# Altium PCB plusz-end-card-with-turnstile-mezzanine.PcbDoc
Units mm, origin at the board's own origin, x right, y up, seen from the top; angles counter-clockwise.
Board outline 80 x 71.5 mm, 4 copper layers (Top, Route2, Route15, Bottom), stack 1.791 mm thick; 29 components, 21 nets, 107 pads, 536 vias.
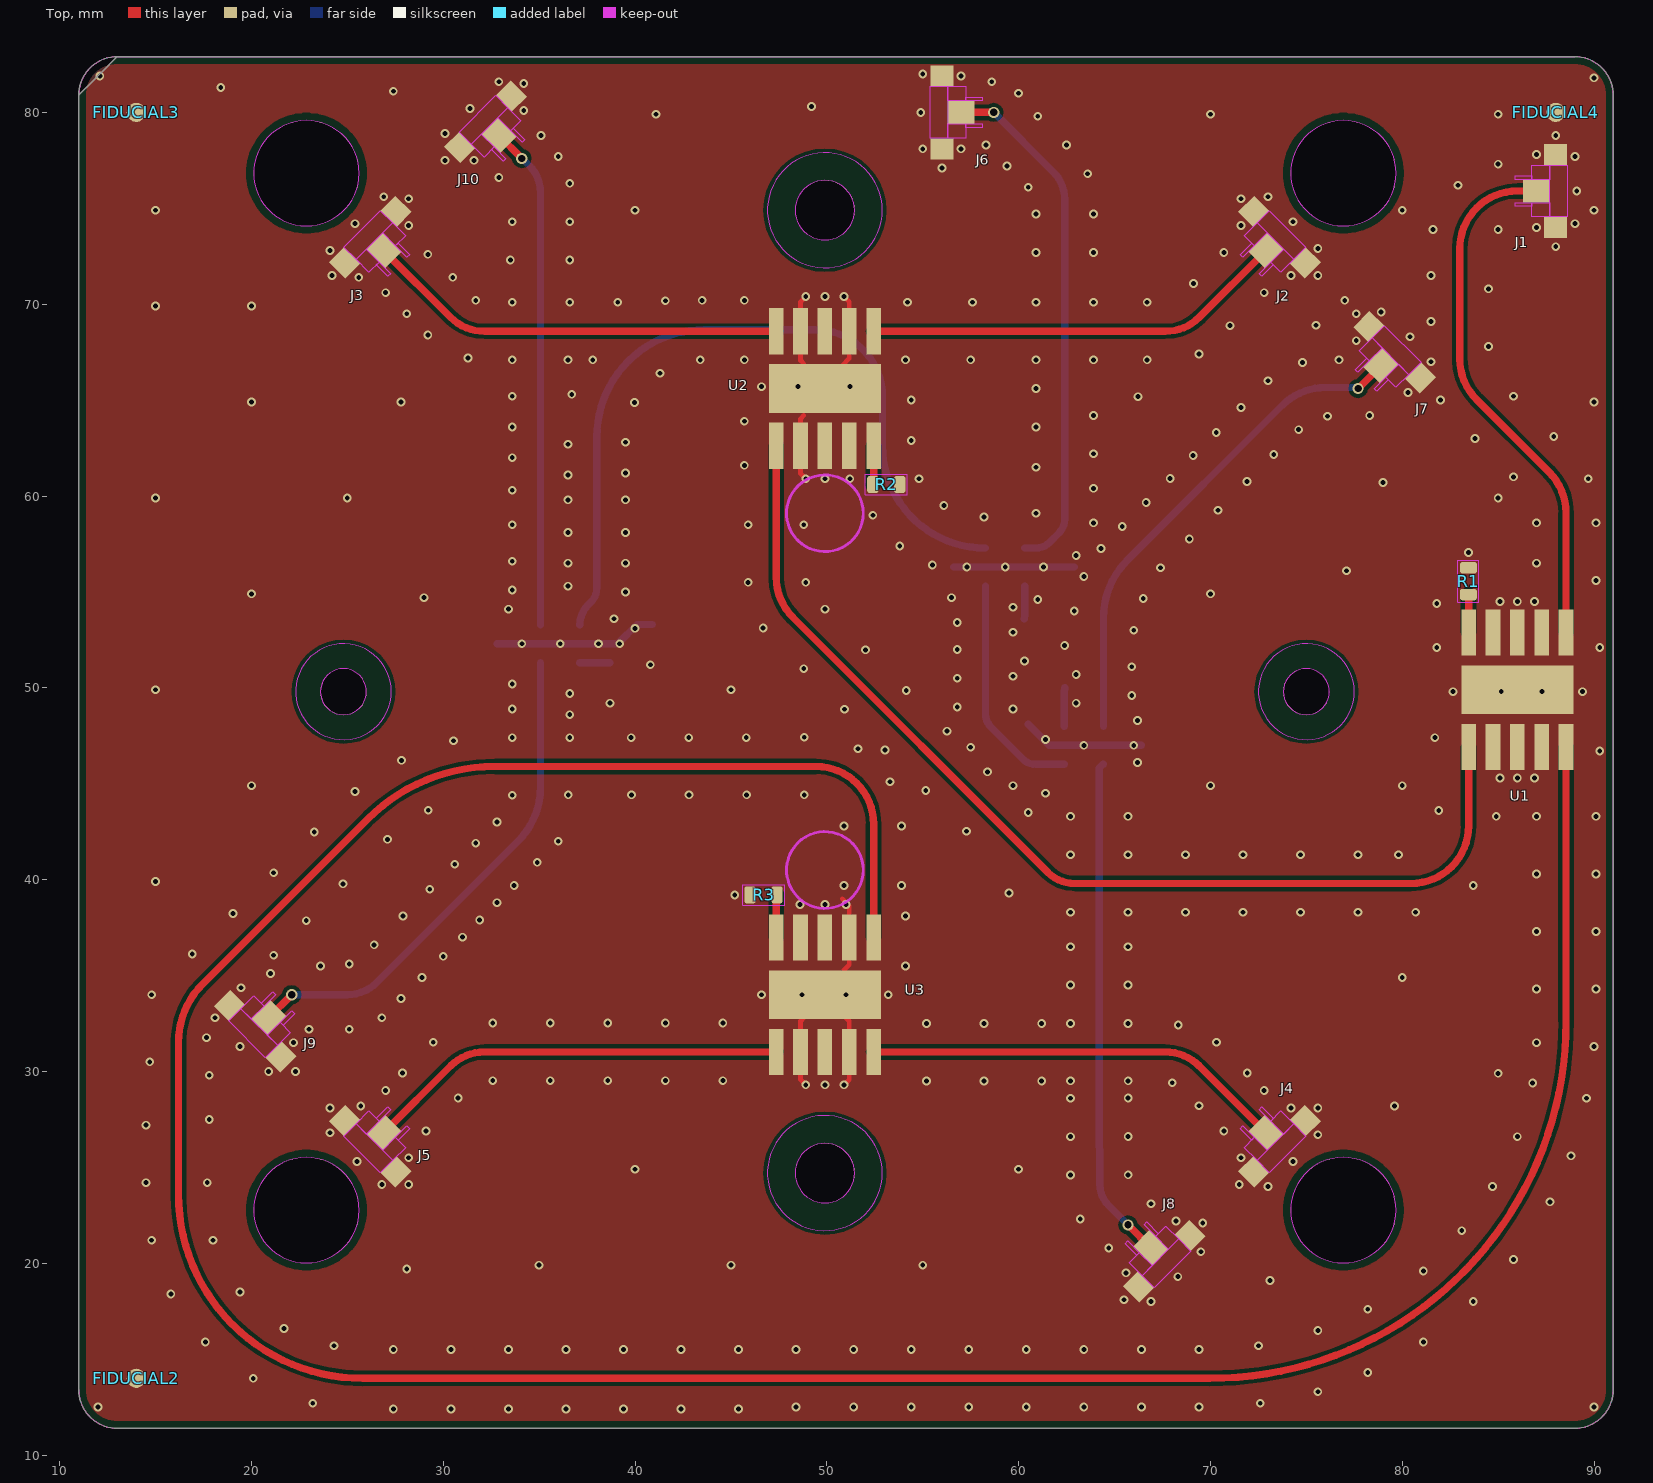
[diagram p0: Top view]
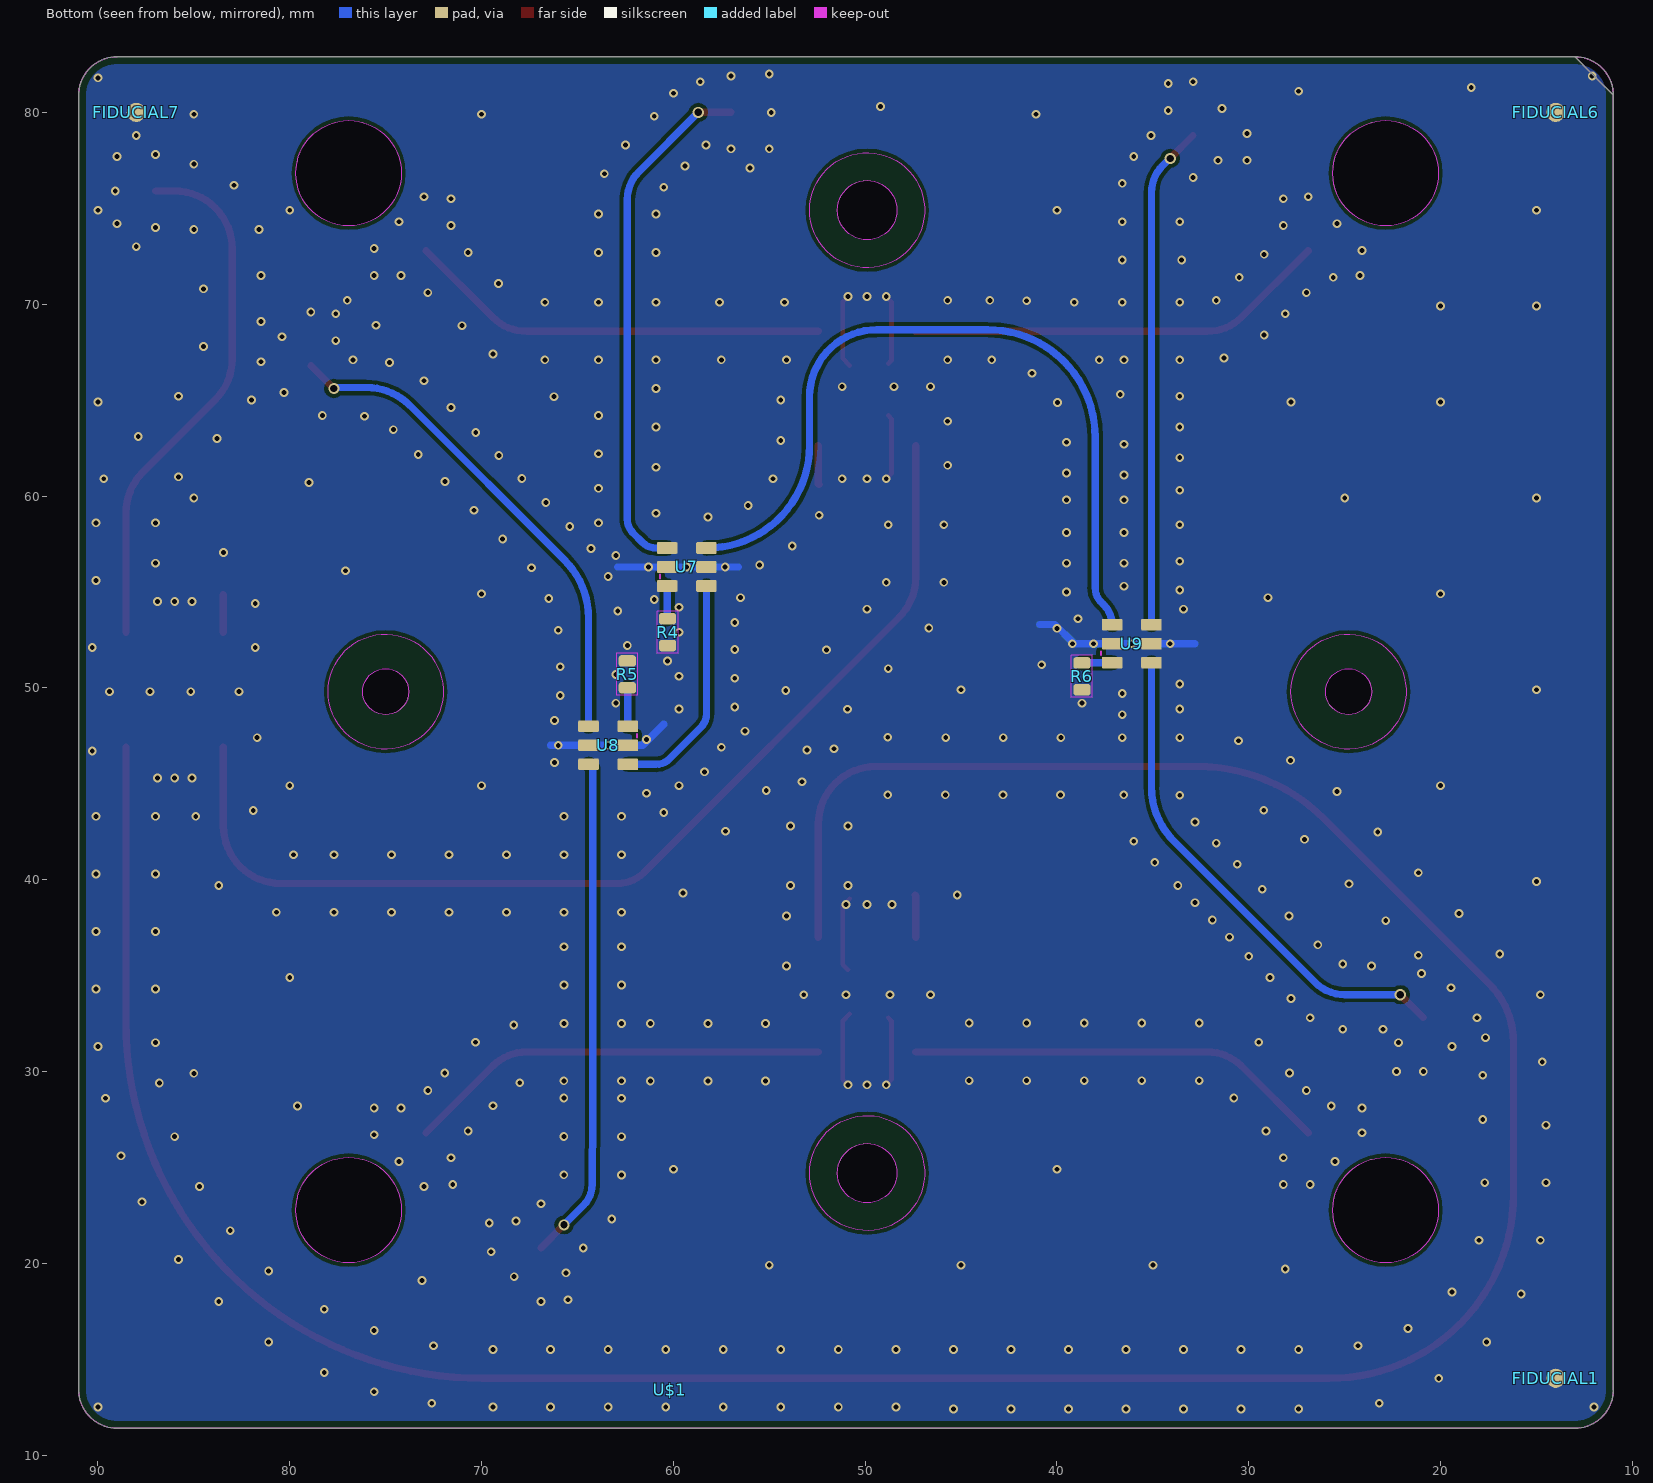
[diagram p1: Bottom view, seen from below]
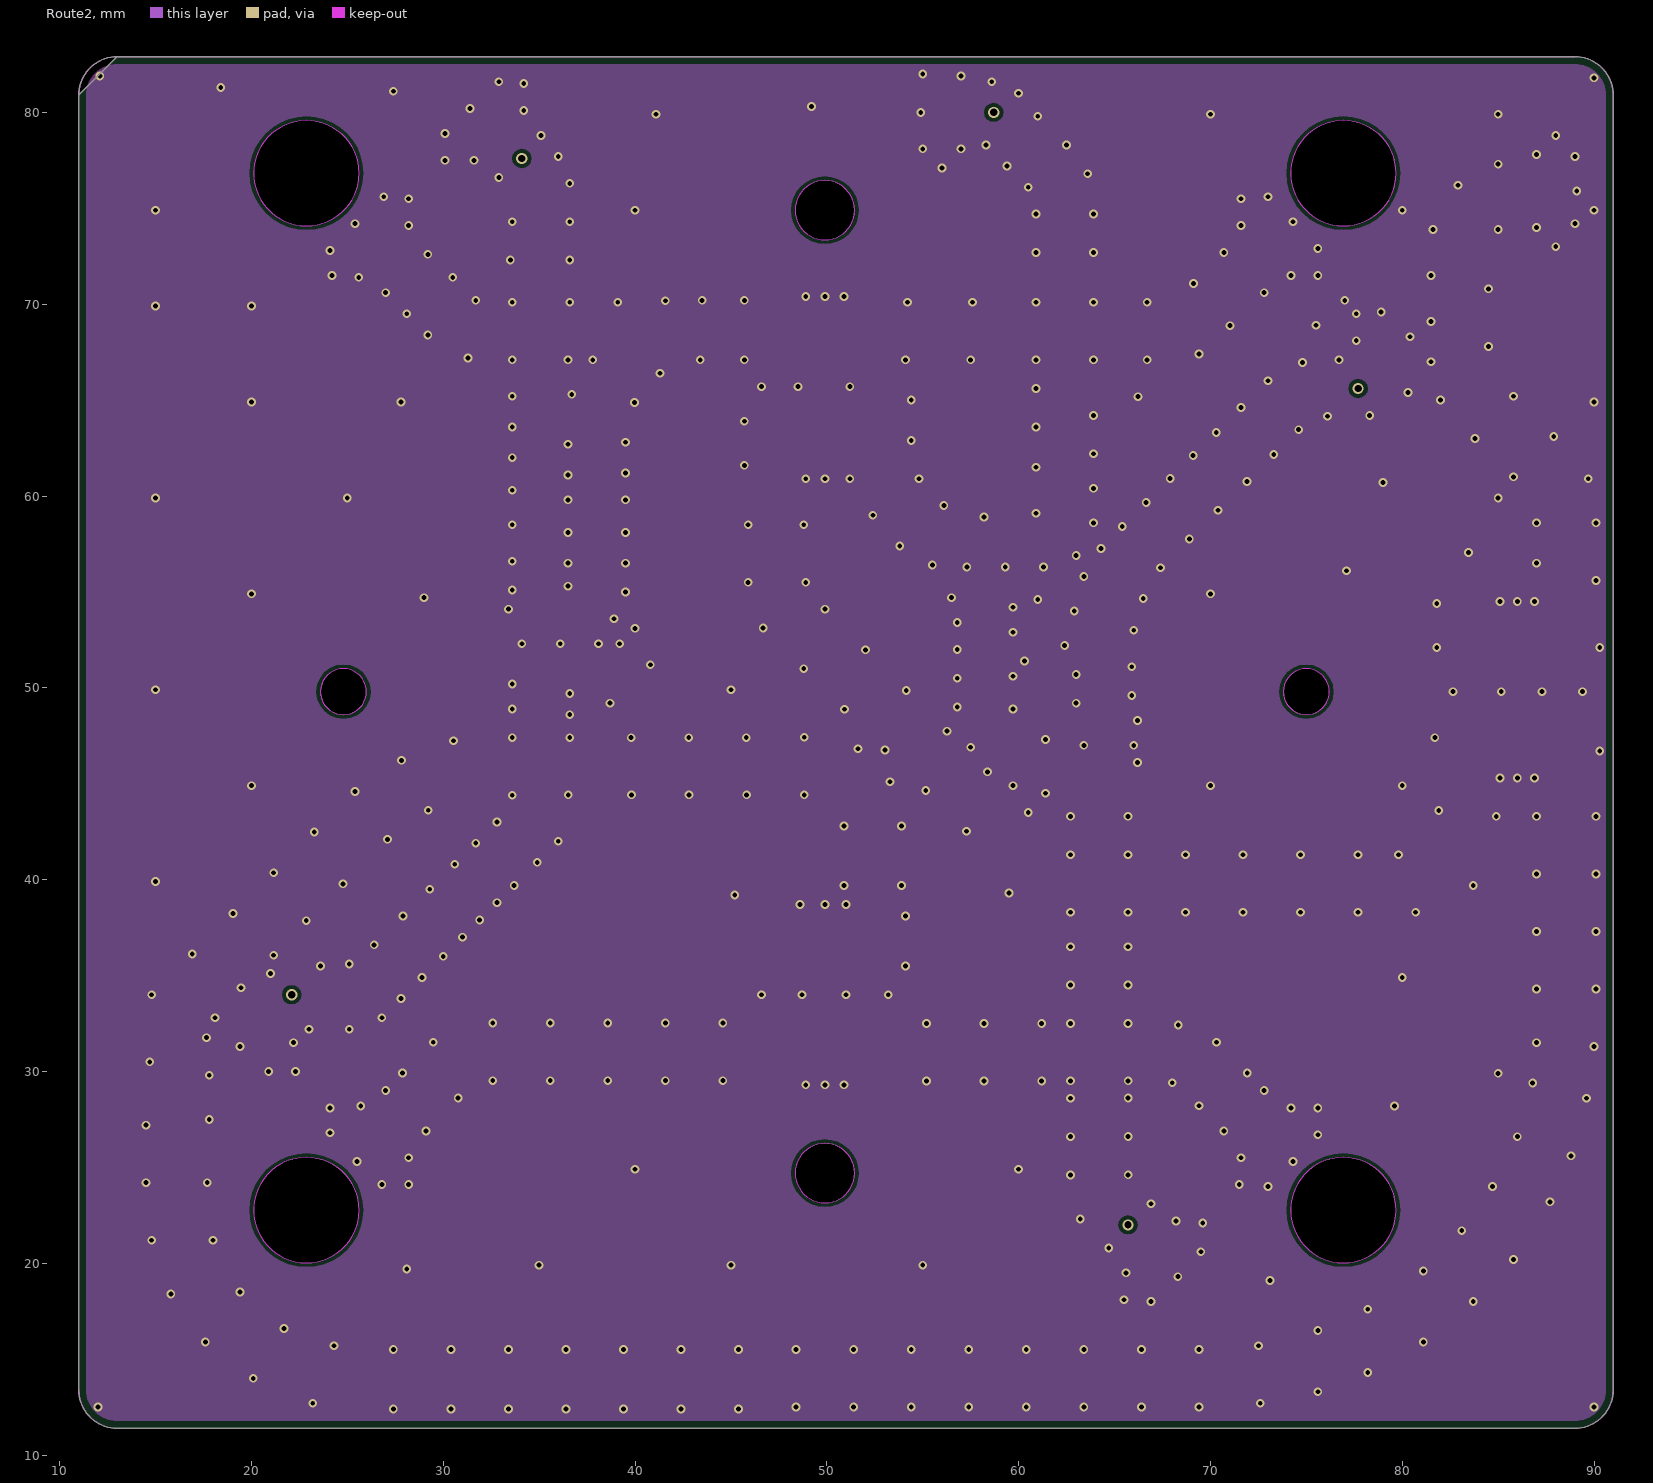
[diagram p2: Route2]
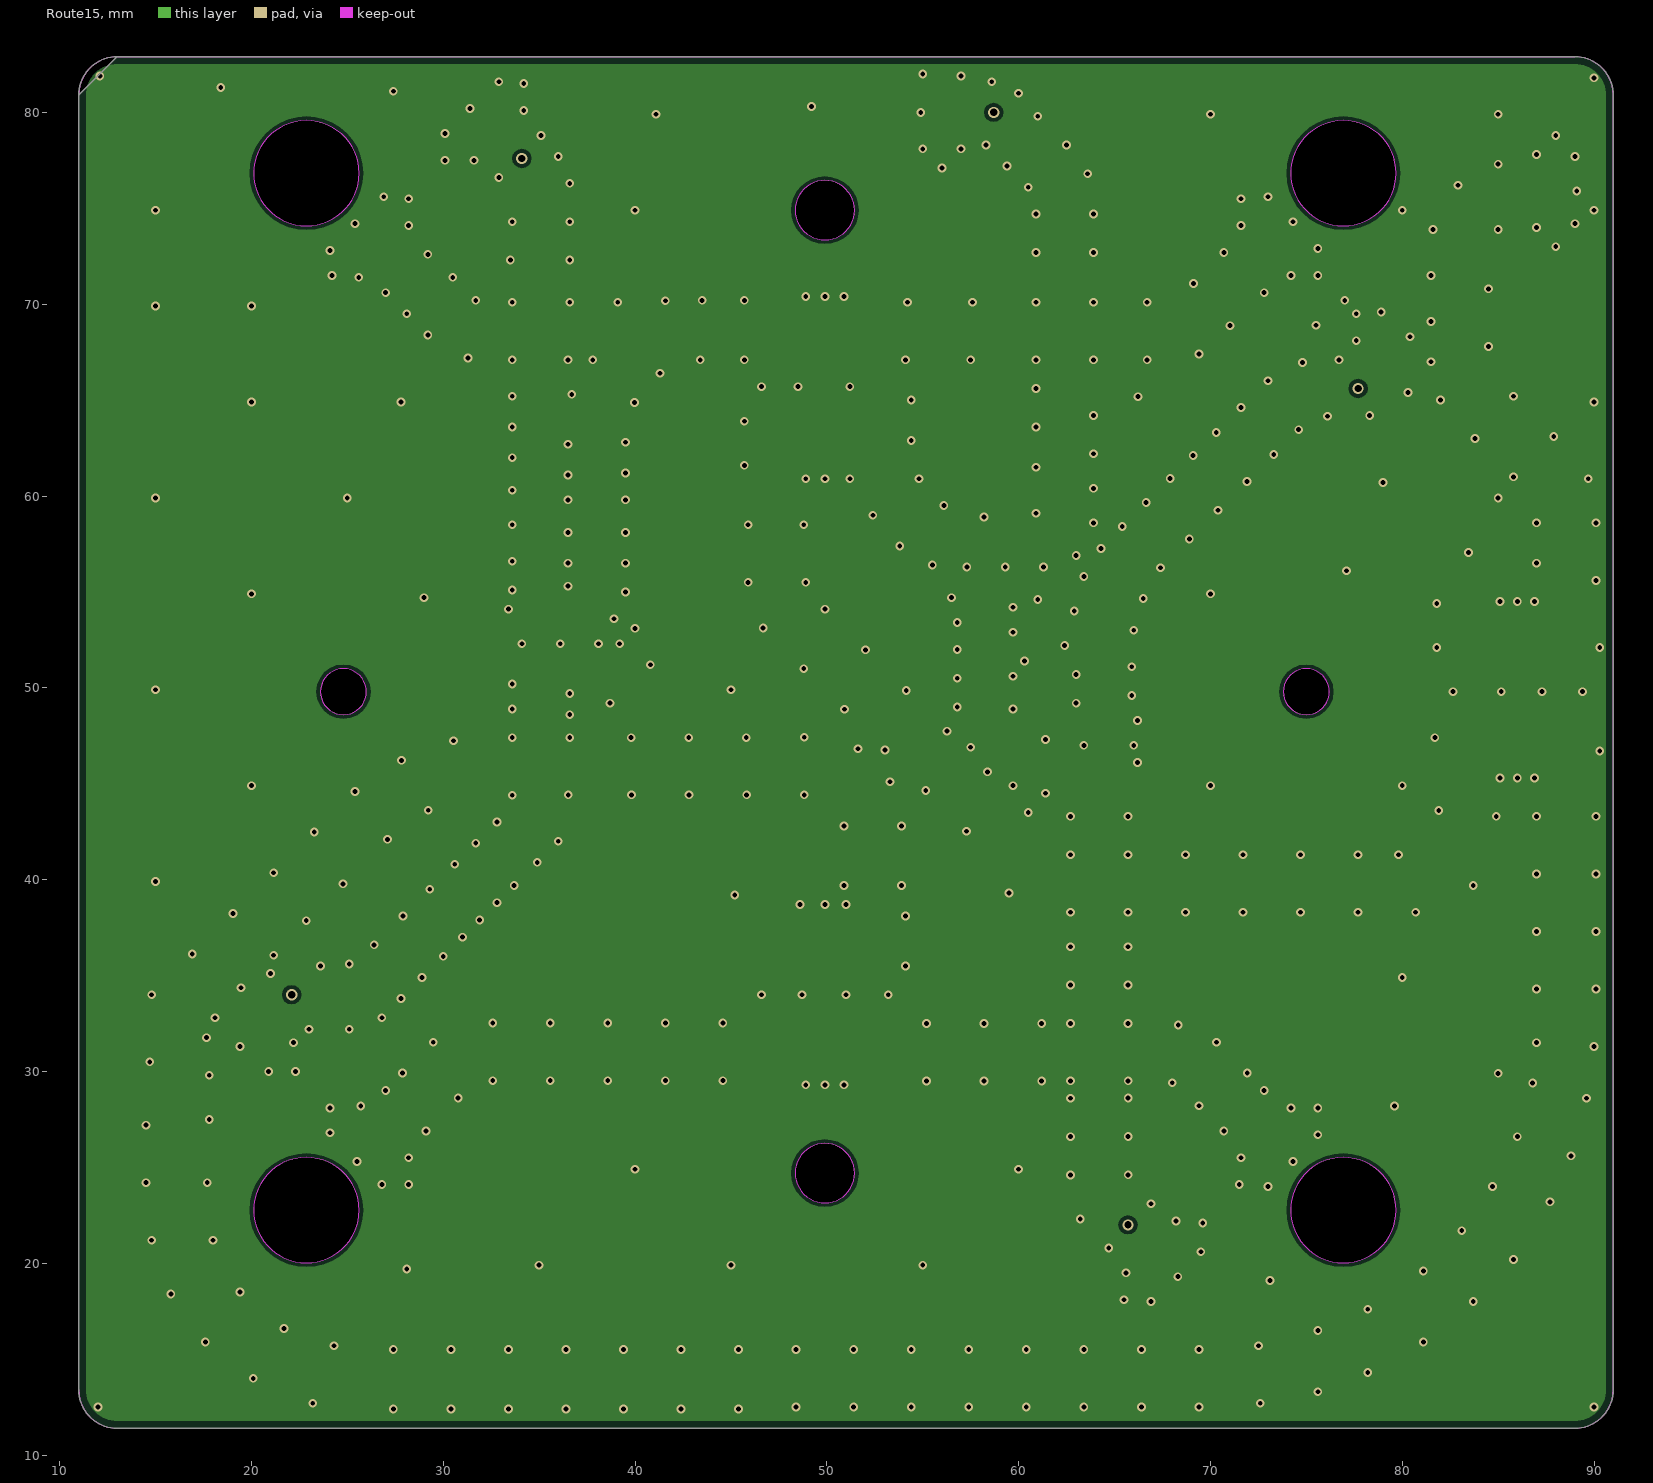
[diagram p3: Route15]

## Layer stack, top to bottom
Top Solder: solder mask 0.0102, Solder Resist, Dk 3.5
Top: signal copper 0.0356
Dielectric 1: dielectric 0.32, FR-4, Dk 4.8
Route2: signal copper 0.0178
Dielectric 2: core 0.1702, FR-4, Dk 4.8
Route15: signal copper 0.0178
Dielectric 3: core 1.1938, FR-4, Dk 4.8
Bottom: signal copper 0.0356
Bottom Solder: solder mask 0.0102, Solder Resist, Dk 3.5

## Board outline
11,80.9 cw(c13,80.9) 13,82.9 89,82.9 cw(c89,80.9) 91,80.9 91,13.4 cw(c89,13.4) 89,11.4 13,11.4 cw(c13,13.4) 11,13.4 11,80.9 cw(c13,80.9)
cut-out: 22.87,74.08 ccw(c22.87,76.83) 25.62,76.83 ccw(c22.87,76.83) 22.87,79.58 ccw(c22.87,76.83) 20.12,76.83 ccw(c22.87,76.83)
cut-out: 76.93,74.08 ccw(c76.93,76.83) 79.68,76.83 ccw(c76.93,76.83) 76.93,79.58 ccw(c76.93,76.83) 74.18,76.83 ccw(c76.93,76.83)
cut-out: 22.87,20.02 ccw(c22.87,22.77) 25.62,22.77 ccw(c22.87,22.77) 22.87,25.52 ccw(c22.87,22.77) 20.12,22.77 ccw(c22.87,22.77)
cut-out: 76.93,20.02 ccw(c76.93,22.77) 79.68,22.77 ccw(c76.93,22.77) 76.93,25.52 ccw(c76.93,22.77) 74.18,22.77 ccw(c76.93,22.77)
cut-out: 49.9,73.35 ccw(c49.9,74.9) 51.45,74.9 ccw(c49.9,74.9) 49.9,76.45 ccw(c49.9,74.9) 48.35,74.9 ccw(c49.9,74.9)
cut-out: 49.9,23.15 ccw(c49.9,24.7) 51.45,24.7 ccw(c49.9,24.7) 49.9,26.25 ccw(c49.9,24.7) 48.35,24.7 ccw(c49.9,24.7)
cut-out: 24.8,48.6 ccw(c24.8,49.8) 26,49.8 ccw(c24.8,49.8) 24.8,51 ccw(c24.8,49.8) 23.6,49.8 ccw(c24.8,49.8)
cut-out: 75,48.6 ccw(c75,49.8) 76.2,49.8 ccw(c75,49.8) 75,51 ccw(c75,49.8) 73.8,49.8 ccw(c75,49.8)

## Design rules (kind name [scope] priority, off if disabled: settings)
BoardOutlineClearance mdCopperDimension [All] p1: gap=0.254 ignorepadtopadclearanceinfootprint=FALSE except(0: Arc-SplitContinuation Track-SplitContinuation SMDPad-SplitContinuation THPad-SplitContinuation Via-SplitContinuation Fill-SplitContinuation Poly-SplitContinuation Region-SplitContinuation Text-SplitContinuation; 0.381: Poly-OutlineEdge Poly-CavityEdge Poly-CutoutEdge Poly-SplitBarrior)
Clearance Clearance_for_PolygonClass_Isolate_7.87 [InPolygonClass('Isolate_7.87') vs IsArc Or IsTrack Or IsPad Or IsVia Or IsFill Or IsRegion Or IsText] p1: gap=0.2 ignorepadtopadclearanceinfootprint=FALSE
Clearance "Clearance (Same Net)" [All] p2: gap=0.127 ignorepadtopadclearanceinfootprint=FALSE
Clearance Clearance_for_NetClass_RF [InNetClass('RF') vs InNetClass('RF')] p3: gap=1 ignorepadtopadclearanceinfootprint=FALSE
Clearance [All] p4: gap=0.127 ignorepadtopadclearanceinfootprint=FALSE
HoleSize HoleSize_For_NetClass_RF [InNetClass('RF')] p1: absolutevalues=TRUE maxlimit=0.38 minlimit=0.38 maxpercent=80.000 minpercent=20.000
HoleSize [All] p2: absolutevalues=TRUE maxlimit=2540 minlimit=0.254 maxpercent=80.000 minpercent=20.000
HoleToHoleClearance mdDrill [All] p1: gap=0.152 allowstackedmicrovias=TRUE
MinimumSolderMaskSliver [All] p1 off: minsoldermaskwidth=0.254
PasteMaskExpansion Expansion_SMDPaste_OFF [InPadClass('SMDPaste_OFF')] p1: expansion=0
PasteMaskExpansion mlMinCreamFrame [All] p2: expansion=0
PolygonConnect PolygonConnect_For_PolygonThermal_ON_Width50000_Gap100000 [InPolygonClass('PolygonThermal_ON_Width50000_Gap100000') vs Not IsVia] p1: connectstyle=Relief reliefconductorwidth=0.127 reliefentries=4 polygonreliefangle="90 Angle" airgapwidth=0.254
PolygonConnect PolygonConnect_For_PolygonThermal_OFF [InPolygonClass('PolygonThermal_OFF')] p2: connectstyle=Direct reliefconductorwidth=0.254 reliefentries=4 polygonreliefangle="90 Angle" airgapwidth=0.254
PolygonConnect ThermalVias [IsVia] p3: connectstyle=Direct reliefconductorwidth=0.254 reliefentries=4 polygonreliefangle="90 Angle" airgapwidth=0.254
PolygonConnect [All] p4: connectstyle=Relief reliefconductorwidth=0.254 reliefentries=4 polygonreliefangle="90 Angle" airgapwidth=0.254
RoutingVias [All] p1: holewidth=0.254 width=0.457 viastyle="Through Hole" minholewidth=0.254 minwidth=0.457 maxholewidth=2.54 maxwidth=2.54
SolderMaskExpansion Expansion_SMDSolder_OFF [InPadClass('SMDSolder_OFF')] p1: expansion=0 istentingtop=FALSE
SolderMaskExpansion mlMinStopFrame [All] p2: expansion=0.064 istentingtop=FALSE
Width Width_For_NetClass_RF [InNetClass('RF')] p1: maxlimit=0.76 minlimit=0.254 preferedwidth=0.38
Width [All] p2: maxlimit=254 minlimit=0.127 preferedwidth=0.127
26 further rules are at their usual default settings.

## Classes and differential pairs
polygon class PolygonThermal_ON_Width50000_Gap100000: Polygon_1_Net_GND Polygon_4_Net_GND
polygon class PolygonThermal_OFF: Polygon_2_Net_GND Polygon_3_Net_GND
polygon class Isolate_7.87: Polygon_1_Net_GND Polygon_2_Net_GND Polygon_3_Net_GND Polygon_4_Net_GND
pad class SMDSolder_OFF: FIDUCIAL1-FIDUCIAL FIDUCIAL2-FIDUCIAL FIDUCIAL3-FIDUCIAL FIDUCIAL4-FIDUCIAL FIDUCIAL6-FIDUCIAL FIDUCIAL7-FIDUCIAL R1-1 R1-2 R2-1 R2-2 R3-1 R3-2 R4-1 R4-2 R5-1 R5-2 R6-1 R6-2 U1-GND-NO-PAD U2-GND-NO-PAD U3-GND-NO-PAD
pad class SMDPaste_OFF: FIDUCIAL1-FIDUCIAL FIDUCIAL2-FIDUCIAL FIDUCIAL3-FIDUCIAL FIDUCIAL4-FIDUCIAL FIDUCIAL6-FIDUCIAL FIDUCIAL7-FIDUCIAL U1-GND-NO-PAD U2-GND-NO-PAD U3-GND-NO-PAD U7-1 U7-2 U7-3 U7-4 U7-5 U7-6 U8-1 U8-2 U8-3 U8-4 U8-5 U8-6 U9-1 U9-2 U9-3 U9-4 U9-5 U9-6
net class RF: L1BAND L1BAND-SHORT L1BAND-SHORT+1/4WAVE L1BAND_0 L1BAND_90 L1BAND_180 L1BAND_270 UHF UHF-SHORT UHF-SHORT+1/4WAVE UHF_0 UHF_90 UHF_180 UHF_270

## Components (designator, comment, footprint, x,y, rotation, side; value= is the part's Value field where it differs from the comment)
FIDUCIAL1 "" FIDUCIAL-1.0X2.0 14,14 r180 bottom
FIDUCIAL2 "" FIDUCIAL-1.0X2.0 14,14 r0 top
FIDUCIAL3 "" FIDUCIAL-1.0X2.0 14,80 r0 top
FIDUCIAL4 "" FIDUCIAL-1.0X2.0 88,80 r0 top
FIDUCIAL6 "" FIDUCIAL-1.0X2.0 14,80 r180 bottom
FIDUCIAL7 "" FIDUCIAL-1.0X2.0 88,80 r180 bottom
J1 "" R107064070_SOLDER 88,75.9 r270 top
J2 "" R107064070_SOLDER 73.6,73.5 r315 top
J3 "" R107064070_SOLDER 26.2,73.5 r45 top
J4 "" R107064070_SOLDER 73.6,26.1 r225 top
J5 "" R107064070_SOLDER 26.2,26.1 r135 top
J6 "" R107064070_SOLDER 56,80 r90 top
J7 "" R107064070_SOLDER 79.6,67.5 r315 top
J8 "" R107064070_SOLDER 67.6,20.1 r225 top
J9 "" R107064070_SOLDER 20.2,32.1 r135 top
J10 "" R107064070_SOLDER 32.205,79.504 r45 top
R1 "50" .0603-C-NOSILK 83.45,55.56 r270 top
R2 "50" .0603-C-NOSILK 53.1,60.6 r180 top
R3 "50" .0603-C-NOSILK 46.7,39.2 r0 top
R4 "50" .0603-C-NOSILK 60.3,52.9 r90 bottom
R5 "50" .0603-C-NOSILK 62.4,50.7 r270 bottom
R6 "50" .0603-C-NOSILK 38.7,50.6 r90 bottom
U1 "" QBA-07+ 86,49.9 r180 top
U2 "" QBA-07+ 49.9,65.6 r0 top
U3 "" QBA-07+ 49.9,34 r180 top
U7 "QCN-19+" QCN-XXX+ 59.3,56.3 r270 bottom
U8 "QCN-19+" QCN-XXX+ 63.4,47 r90 bottom
U9 "QCN-19+" QCN-XXX+ 36.1,52.3 r270 bottom
U$1 "" FLIGHTMARKER_NEW_BOARDS 60.2,13.4 r180 bottom

## Footprints (in the part's own frame and the unit in brackets; to place one, negate y for a bottom-side part, rotate by r counter-clockwise, add the part's x,y. Pads: shape width x height; smd on the part's side, far side on the other; paste and mask are expansions set on the pad)
.0603-C-NOSILK [mm] ".0603-C-NOSILK"
  rrect50% 0.6x0.9 smd mask+0: 1(-0.7,0) 2(0.7,0)
  Top keep-out lines w0.01: 1.095,-0.545 1.095,0.545 -1.095,0.545 -1.095,-0.545 1.095,-0.545
  body extent -1.1,-0.55 1.1,0.55, height 3.81
FIDUCIAL-1.0X2.0 [mm] "FIDUCIAL-1.0X2.0"
  rrect100% 1x1 smd paste+0 mask+0: FIDUCIAL(0,0)
  body extent -1.01,-1.01 1.01,1.01, height 3.81
FLIGHTMARKER_NEW_BOARDS [mm] "FLIGHTMARKER_NEW_BOARDS"
QBA-07+ [mil] "QBA-07+"
  rect 30x95 smd: 1(-100,-117.52) 2(-50,-117.52) 3(0,-117.52) 4(50,-117.52) 5(100,-117.52) 6(100,117.52) 7(50,117.52) 8(0,117.52) 9(-50,117.52) 10(-100,117.52)
  rect 229.92x100 smd paste+0 mask+0: GND-NO-PAD(0,0)
  body extent -155,-165 155,165, height 150
QCN-XXX+ [mm] "QCN-XXX+"
  rrect20% 0.61x1.07 smd paste+0: 1(-0.99,-1.025) 2(0,-1.025) 3(0.99,-1.025) 4(0.99,1.025) 5(0,1.025) 6(-0.99,1.025)
  body extent -1.3,-1.56 1.3,1.56, height 3.81
R107064070_SOLDER [mm] "R107064070_SOLDER"
  rect 1.2x1.4 smd: P$1(0,-1)
  rect 1.1x1.2 smd: P$2(-1.9,0) P$3(1.9,0)
  Top keep-out region: 0.6,-2.1 0.6,-1.25 0.8,-1.25 0.8,-2.1
  Top keep-out region: 0.6,-1.25 0.6,-0.3 1.35,-0.3 1.35,-1.25
  Top keep-out region: -0.8,-2.1 -0.8,-1.25 -0.6,-1.25 -0.6,-2.1
  Top keep-out region: -1.35,-1.25 -1.35,-0.3 -0.6,-0.3 -0.6,-1.25
  Top keep-out region: -1.35,-0.3 -1.35,0.6 1.35,0.6 1.35,-0.3
  body extent -2.45,-2.1 2.45,0.6, height 3.81

## Part data
FIDUCIAL1 FIDUCIAL2 FIDUCIAL3 FIDUCIAL4 FIDUCIAL6 FIDUCIAL7: library part FIDUCIAL-1.0X2.0, PackageName=FIDUCIAL-1.0X2.0
J1 J2 J3 J4 J5 J6 J7 J8 J9 J10: library part R107064070_SOLDER, PackageName=R107064070_SOLDER
R1 R2 R3 R4 R5 R6: library part .0603-C-NOSILK, PackageName=.0603-C-NOSILK
U1 U2 U3: library part QBA-07+, PackageName=QBA-07+
U7 U8 U9: library part QCN-XXX+, PackageName=QCN-XXX+
U$1: library part FLIGHTMARKER_NEW_BOARDS, PackageName=FLIGHTMARKER_NEW_BOARDS

## Free pads (board coordinates)
  round 2.4 hole 2.4 unplated: MH1(24.8,49.8) MH2(75,49.8)
  round 3.1 hole 3.1 unplated: MH3(49.9,74.9) MH4(49.9,24.7)
  round 5.5 hole 5.5 unplated: MH5(76.93,76.83) MH6(22.87,76.83) MH7(76.93,22.77) MH8(22.87,22.77)

## Via types
v1: diameter 0.457/0.457/0.457/0.457 (per signal layer), hole 0.254, Top to Bottom, 531 vias
v2: diameter 0.583/0.583/0.583/0.583 (per signal layer), hole 0.38, Top to Bottom, 5 vias

## Nets (pads, with @x,y where several pads share a name; then routed paths per layer and width w, separated by ;. In a path a pad name is that pad's centre, name@x,y a point inside that pad or via, vN(x,y) a via of type N, cw(c..) or ccw(c..) an arc to the next point about the centre after c; other vN are vias at no path point)
GND: J1.P$2 J1.P$3 J2.P$2 J2.P$3 J3.P$2 J3.P$3 J4.P$2 J4.P$3 J5.P$2 J5.P$3 J6.P$2 J6.P$3 J7.P$2 J7.P$3 J8.P$2 J8.P$3 J9.P$2 J9.P$3 J10.P$2 J10.P$3 R1.1 R2.1 R3.1 R4.1 R5.1 R6.1 U1.2 U1.3 U1.4 U1.7 U1.8 U1.9 U1.GND-NO-PAD U2.2 U2.3 U2.4 U2.7 U2.8 U2.9 U2.GND-NO-PAD U3.2 U3.3 U3.4 U3.7 U3.8 U3.9 U3.GND-NO-PAD U7.2 U7.5 U8.2 U8.5 U9.2 U9.5 | length 43.9
  Top w0.25: U3.GND-NO-PAD@48.8,32.8 48.63,32.63 U3.7 48.63,29.57 v1(48.9,29.3) ; 48.8,64.2 48.63,64.03 U2.2 48.63,61.17 v1(48.9,60.9) ; 48.8,66.9 48.63,67.07 U2.9 48.63,70.13 v1(48.9,70.4) ; U3.GND-NO-PAD@50.8,33 51.17,32.63 U3.9 51.17,29.57 v1(50.9,29.3) ; 50.8,39 51.17,38.63 U3.2 51.17,35.57 50.9,35.3 ; U2.GND-NO-PAD@50.8,66.8 51.17,67.17 U2.7 51.17,70.13 v1(50.9,70.4)
  Bottom w0.38: 32.8,52.3 U9.5 U9.2 v1(39.2,52.3) 39.15,52.35 40.1,53.3 40.9,53.3 ; 56.6,56.3 v1(57.3,56.3) U7.5 U7.2 62.9,56.3 ; 60.5,48.1 61.6,47 U8.2 U8.5 66.4,47
  other v1: 27.4,12.4 30.4,12.4 33.4,12.4 36.4,12.4 39.4,12.4 42.4,12.4 45.4,12.4 12,12.5 48.4,12.5 51.4,12.5 54.4,12.5 57.4,12.5 60.4,12.5 63.4,12.5 66.4,12.5 69.4,12.5 90,12.5 23.2,12.7 72.6,12.7 75.6,13.3 20.1,14 78.2,14.3 27.4,15.5 30.4,15.5 33.4,15.5 36.4,15.5 39.4,15.5 42.4,15.5 45.4,15.5 48.4,15.5 51.4,15.5 54.4,15.5 57.4,15.5 60.4,15.5 63.4,15.5 66.4,15.5 69.4,15.5 24.3,15.7 72.5,15.7 17.6,15.9 81.1,15.9 75.6,16.5 21.7,16.6 78.2,17.6 66.9,18 83.7,18 65.5,18.1 15.8,18.4 19.4,18.5 73.1,19.1 68.3,19.3 65.6,19.5 81.1,19.6 28.1,19.7 35,19.9 45,19.9 55,19.9 85.8,20.2 69.5,20.6 64.7,20.8 14.8,21.2 18,21.2 83.1,21.7 69.6,22.1 68.2,22.2 63.21,22.31 66.9,23.1 87.7,23.2 73,24 84.7,24 26.8,24.1 28.2,24.1 71.5,24.1 14.5,24.2 17.7,24.2 62.7,24.6 65.71,24.61 40,24.9 60,24.9 25.5,25.3 74.3,25.3 28.2,25.5 71.6,25.5 88.8,25.6 62.7,26.6 86,26.6 65.71,26.61 75.6,26.7 24.1,26.8 29.1,26.9 70.7,26.9 14.5,27.2 17.8,27.5 24.1,28.1 74.2,28.1 75.6,28.1 25.7,28.2 79.6,28.2 69.41,28.21 62.7,28.6 65.71,28.61 89.6,28.6 30.78,28.62 27,29 72.8,29 49.9,29.3 86.8,29.4 68.01,29.41 55.2,29.5 58.2,29.5 61.2,29.5 32.58,29.52 35.58,29.52 38.58,29.52 41.58,29.52 44.58,29.52 62.71,29.51 65.71,29.51 17.8,29.8 85,29.9 27.88,29.92 71.92,29.92 20.9,30 22.3,30 14.7,30.5 19.4,31.3 90,31.3 22.2,31.5 87,31.5 29.48,31.52 70.32,31.52 17.66,31.76 23,32.2 25.1,32.2 68.32,32.42 32.58,32.52 35.58,32.52 38.58,32.52 41.58,32.52 44.58,32.52 55.2,32.5 58.2,32.5 61.2,32.5 62.7,32.5 65.7,32.5 18.1,32.8 26.8,32.8 27.8,33.8 14.8,34 46.6,34 48.7,34 51,34 53.2,34 87,34.3 90.1,34.3 19.46,34.36 62.7,34.5 65.7,34.5 28.9,34.9 80,34.9 21,35.1 23.6,35.5 54.1,35.5 25.1,35.6 30,36 21.16,36.06 16.92,36.12 62.7,36.5 65.7,36.5 26.4,36.6 31,37 87,37.3 90.1,37.3 22.86,37.86 31.9,37.9 27.9,38.1 54.1,38.1 19.04,38.24 62.7,38.3 65.7,38.3 68.7,38.3 71.7,38.3 74.7,38.3 77.7,38.3 80.7,38.3 48.6,38.7 49.9,38.7 51,38.7 32.8,38.8 45.2,39.2 59.5,39.3 29.3,39.5 33.7,39.7 50.9,39.7 53.9,39.7 83.7,39.7 24.78,39.78 15,39.9 87,40.3 90.1,40.3 21.16,40.36 30.6,40.8 34.9,40.9 62.7,41.3 65.7,41.3 68.7,41.3 71.7,41.3 74.7,41.3 77.7,41.3 79.8,41.3 31.7,41.9 36,42 27.1,42.1 23.28,42.48 57.28,42.52 50.9,42.8 53.9,42.8 32.8,43 62.7,43.3 65.7,43.3 84.9,43.3 87,43.3 90.1,43.3 60.5,43.5 29.22,43.62 81.9,43.6 33.6,44.4 36.52,44.42 39.82,44.42 42.82,44.42 45.82,44.42 48.82,44.42 61.4,44.5 25.4,44.6 55.16,44.64 20,44.9 59.7,44.9 70,44.9 80,44.9 53.3,45.1 85.1,45.3 86,45.3 86.9,45.3 58.38,45.62 66.2,46.1 27.82,46.22 90.3,46.7 53.04,46.76 51.62,46.82 57.5,46.9 63.4,47 66,47 30.54,47.24 61.4,47.3 33.6,47.4 36.6,47.4 39.8,47.4 42.8,47.4 45.8,47.4 81.7,47.4 48.82,47.42 56.26,47.74 66.2,48.3 36.6,48.6 50.92,48.88 33.6,48.9 59.7,48.9 56.8,49 38.7,49.2 63,49.2 65.9,49.6 36.6,49.7 82.64,49.8 85.16,49.8 87.28,49.8 89.4,49.8 54.14,49.86 15,49.9 45,49.9 33.6,50.2 56.8,50.5 59.7,50.6 63,50.7 48.8,51 65.9,51.1 40.8,51.2 60.3,51.4 52.02,51.98 56.8,52 81.8,52.1 90.3,52.1 62.4,52.2 34.1,52.3 36.1,52.3 38.1,52.3 59.7,52.9 66,53 40,53.1 46.68,53.12 56.8,53.4 38.9,53.6 62.9,54 33.4,54.1 49.9,54.1 59.7,54.2 81.8,54.4 85.1,54.5 86,54.5 86.9,54.5 61,54.6 66.5,54.66 29,54.7 56.5,54.7 20,54.9 70,54.9 39.5,55 33.6,55.1 36.5,55.3 45.9,55.5 48.9,55.5 90.1,55.6 63.4,55.8 77.1,56.1 67.4,56.26 59.3,56.3 61.3,56.3 55.5,56.4 36.5,56.5 39.5,56.5 87,56.5 33.6,56.6 63,56.9 83.45,57.05 64.3,57.26 53.8,57.4 68.9,57.76 36.5,58.1 39.5,58.1 65.4,58.41 33.6,58.5 45.9,58.5 48.8,58.5 63.9,58.6 87,58.6 90.1,58.6 58.2,58.9 52.4,59 60.9,59.1 70.4,59.26 56.1,59.5 66.65,59.66 36.5,59.8 39.5,59.8 15,59.9 25,59.9 85,59.9 33.6,60.3 63.9,60.4 79,60.7 71.9,60.76 49.9,60.9 51.2,60.9 54.8,60.9 67.9,60.91 89.7,60.9 85.8,61 36.5,61.1 39.5,61.2 60.9,61.5 45.7,61.6 33.6,62 69.1,62.11 73.3,62.16 63.9,62.2 36.5,62.7 39.5,62.8 54.4,62.9 83.8,63 87.9,63.1 70.3,63.31 74.6,63.46 33.6,63.6 60.9,63.6 45.7,63.9 76.1,64.16 63.9,64.2 78.3,64.2 71.6,64.61 39.98,64.88 20,64.9 27.8,64.9 90,64.9 54.4,65 82,65 66.22,65.18 33.6,65.2 85.8,65.2 36.7,65.3 80.3,65.4 60.9,65.6 46.6,65.7 48.5,65.7 51.2,65.7 73,66.01 41.3,66.4 74.8,66.96 81.5,67 33.6,67.1 36.5,67.1 37.8,67.1 43.4,67.1 45.7,67.1 54.1,67.1 57.5,67.1 60.9,67.1 63.9,67.1 66.7,67.1 76.7,67.1 31.3,67.2 69.4,67.4 84.5,67.8 77.6,68.1 80.4,68.3 29.2,68.4 71.02,68.88 75.5,68.9 81.5,69.1 28.1,69.5 77.6,69.5 78.9,69.6 15,69.9 20,69.9 33.6,70.1 36.6,70.1 39.1,70.1 54.2,70.1 57.6,70.1 60.9,70.1 63.9,70.1 66.7,70.1 41.58,70.18 31.7,70.2 43.5,70.2 45.7,70.2 77,70.2 49.9,70.4 27,70.6 72.8,70.6 84.5,70.8 69.12,71.08 25.6,71.4 30.5,71.4 24.2,71.5 74.2,71.5 75.6,71.5 81.5,71.5 33.5,72.3 36.6,72.3 29.2,72.6 60.9,72.7 63.9,72.7 70.7,72.7 24.1,72.8 75.6,72.9 88,73 81.6,73.9 85,73.9 87,74 28.2,74.1 71.6,74.1 25.4,74.2 89,74.2 33.6,74.3 36.6,74.3 74.3,74.3 60.9,74.7 63.9,74.7 15,74.9 40,74.9 80,74.9 90,74.9 28.2,75.5 71.6,75.5 26.9,75.6 73,75.6 89.1,75.9 60.5,76.1 82.9,76.2 36.6,76.3 32.9,76.6 63.6,76.8 56,77.1 59.4,77.2 85,77.3 30.1,77.5 31.6,77.5 36,77.7 89,77.7 87,77.8 55,78.1 57,78.1 58.3,78.3 62.5,78.3 35.1,78.8 88,78.8 30.1,78.9 61,79.8 41.1,79.9 70,79.9 85,79.9 54.9,80 34.2,80.1 31.4,80.2 49.2,80.3 60,81 27.4,81.1 18.4,81.3 34.2,81.5 32.9,81.6 58.6,81.6 90,81.8 12.1,81.9 57,81.9 55,82
L1BAND: J6.P$1 U7.1 | length 27.2
  Top w0.38: J6.P$1 v2(58.7,80)
  Bottom w0.38: v2(58.7,80) 61.814,76.886 cw(c60.4,75.472) 62.4,75.472 62.4,58.779 cw(c61.4,58.779) 62.107,58.072 61.618,57.583 cw(c60.911,58.29) 60.911,57.29 U7.1
L1BAND-SHORT: U7.4 U8.1 | length 12
  Bottom w0.38: U7.4 58.275,48.639 ccw(c59.275,48.639) 58.568,47.932 60.197,46.303 ccw(c60.904,47.01) 60.904,46.01 U8.1
L1BAND-SHORT+1/4WAVE: U7.6 U9.1 | length 41.1
  Bottom w0.38: U9.1 cw(c38.574,53.29) 37.549,54.314 37.617,54.382 37.71,54.474 ccw(c36.984,55.2) 38.01,55.2 38.01,63.07 cw(c43.61,63.07) 43.61,68.67 49.4,68.67 cw(c49.4,65.17) 52.9,65.17 52.9,62.63 ccw(c58.24,62.63) 58.24,57.29 U7.6
L1BAND_0: J7.P$1 U8.4 | length 26.3
  Top w0.38: v2(77.7,65.6) J7.P$1
  Bottom w0.38: U8.4 64.425,53.65 cw(c68.67,53.65) 65.668,56.652 73.733,64.717 cw(c76.01,62.439) 76.01,65.66 77.64,65.66 v2(77.7,65.6)
L1BAND_90: J8.P$1 U8.6 | length 26.3
  Top w0.38: v2(65.7,22) J8.P$1
  Bottom w0.38: U8.6 64.395,46.01 64.205,45.82 64.205,37.629 64.206,37.63 64.206,27.894 64.209,27.891 64.235,24.1 ccw(c65.793,24.11) 64.692,23.009 v2(65.7,22)
L1BAND_180: J9.P$1 U9.4 | length 26.3
  Top w0.38: J9.P$1 v2(22.1,34)
  Bottom w0.38: v2(22.1,34) 24.996,34 ccw(c24.996,36.183) 26.539,34.639 33.903,42.003 ccw(c31.075,44.832) 35.075,44.832 U9.4
L1BAND_270: J10.P$1 U9.6 | length 26.3
  Top w0.38: J10.P$1@32.912,78.797 34.1,77.609 v2(34.1,77.6)
  Bottom w0.38: v2(34.1,77.6) 34.117,77.6 34.489,77.227 cw(c33.075,75.813) 35.075,75.813 U9.6
N$1: R4.2 U7.3 | length 1.7
  Bottom w0.38: R4.2 60.325,53.825 U7.3
N$2: R5.2 U8.3 | length 2
  Bottom w0.38: U8.3 62.375,49.775 R5.2
N$3: R1.2 U1.5 | length 2
  Top w0.38: R1.2 83.46,54.85 U1.5
N$4: R2.2 U2.5 | length 2
  Top w0.38: R2.2 52.44,60.64 U2.5
N$5: R6.2 U9.3 | length 1.6
  Bottom w0.38: U9.3 38.69,51.31 R6.2
N$6: R3.2 U3.5 | length 2.3
  Top w0.38: U3.5 R3.2@47.36,39.16 ; R3.2@47.36,39.16 R3.2 R3.2@47.36,39.16
UHF: J1.P$1 U1.1 | length 27.8
  Top w0.38: J1.P$1 86,75.9 ccw(c86,72.9) 83,72.9 83,67.143 ccw(c86,67.142) 83.879,65.021 87.661,61.239 cw(c85.54,59.117) 88.54,59.117 U1.1
UHF-SHORT: U1.6 U2.1 | length 55.9
  Top w0.38: U2.1 47.36,55.783 ccw(c50.36,55.783) 48.239,53.661 61.514,40.386 ccw(c62.928,41.8) 62.928,39.8 80.46,39.8 ccw(c80.46,42.8) 83.46,42.8 U1.6
UHF-SHORT+1/4WAVE: U1.10 U3.1 | length 161
  Top w0.38: U3.1 52.44,42.9 ccw(c49.44,42.9) 49.44,45.9 32.677,45.9 ccw(c32.677,36.54) 26.059,43.159 17.461,34.561 ccw(c20.504,31.517) 16.2,31.517 16.2,23.59 ccw(c25.79,23.59) 25.79,14 69.96,14 ccw(c69.96,32.58) 88.54,32.58 U1.10
UHF_0: J2.P$1 U2.6 | length 22.1
  Top w0.38: U2.6 67.649,68.585 ccw(c67.649,71.085) 69.417,69.317 J2.P$1
UHF_90: J3.P$1 U2.10 | length 22.1
  Top w0.38: J3.P$1 30.383,69.317 ccw(c32.151,71.085) 32.151,68.585 U2.10
UHF_180: J5.P$1 U3.6 | length 22.1
  Top w0.38: J5.P$1 30.383,30.283 cw(c32.151,28.515) 32.151,31.015 U3.6
UHF_270: J4.P$1 U3.10 | length 22.1
  Top w0.38: U3.10 58.6,31.015 67.649,31.015 cw(c67.649,28.515) 69.417,30.283 J4.P$1
pads on no net: FIDUCIAL1.FIDUCIAL FIDUCIAL2.FIDUCIAL FIDUCIAL3.FIDUCIAL FIDUCIAL4.FIDUCIAL FIDUCIAL6.FIDUCIAL FIDUCIAL7.FIDUCIAL

## Polygon pours and split planes (outlines as drawn)
GND on Top "Polygon_1_Net_GND" (solid, remove dead copper, pour order 2): 10.936,82.964 10.936,11.337 91.064,11.337 91.064,82.964
GND on Route2 "Polygon_2_Net_GND" (solid, remove dead copper, pour order 3): 10.936,82.964 10.936,11.337 91.064,11.337 91.064,82.964
GND on Route15 "Polygon_3_Net_GND" (solid, remove dead copper, pour order 0): 10.936,82.964 10.936,11.337 91.064,11.337 91.064,82.964
GND on Bottom "Polygon_4_Net_GND" (solid, remove dead copper, pour order 1): 10.936,82.964 10.936,11.337 91.064,11.337 91.064,82.964

## Keep-outs
Top:
  circle w0.152: c49.9,59.1 r2
  circle w0.152: c49.9,40.5 r2
  circle w0: c75,49.8 r2.5
  circle w0: c24.8,49.8 r2.5
  circle w0: c49.9,74.9 r3
  circle w0: c49.9,24.7 r3
Bottom:
  circle w0: c75,49.8 r3
  circle w0: c24.8,49.8 r3
  circle w0: c49.9,74.9 r3
  circle w0: c49.9,24.7 r3
  lines w0.1: 37.7,51.7 37.7,51.9 ; 60.7,55.7 60.7,55.9 ; 61.9,47.4 61.9,47.6
Keep-Out Layer:
  the board outline again, w0.001

## Silkscreen, mask and mechanical layers (free items; w line width, h text height)
Top Solder:
  circle w0: c22.1,34 r0.8
  circle w0: c34.1,77.6 r0.8
  circle w0: c77.7,65.6 r0.8
  circle w0: c65.7,22 r0.8
  circle w0: c58.7,80 r0.8
  circle w0: c75,49.8 r2.5
  circle w0: c24.8,49.8 r2.5
  circle w0: c49.9,74.9 r3
  circle w0: c49.9,24.7 r3
  lines w1.5: 28.1,28 30.368,30.268 cw(c32.136,28.5) 32.136,31 46,31 ; 28.2,71.5 30.468,69.232 ccw(c32.236,71) 32.236,68.5 46.1,68.5 ; 32.243,45.9 49.4,45.9 cw(c49.4,42.8) 52.5,42.8 52.5,39.2 ; 32.677,45.9 ccw(c32.677,36.54) 26.059,43.159 17.461,34.561 ccw(c20.504,31.517) 16.2,31.517 16.2,23.59 ccw(c25.79,23.59) 25.79,14 69.96,14 ccw(c69.91,32.63) 88.54,32.68 88.54,44.695 ; 47.36,60.4 47.36,55.636 ccw(c49.83,55.563) 48.032,53.868 48.3,53.6 ; 48.239,53.661 48.3,53.6 ; 53.8,31 67.665,31 cw(c67.664,28.5) 69.432,30.268 71.7,28 ; 53.8,68.6 67.665,68.6 ccw(c67.664,71.1) 69.432,69.332 71.7,71.6 ; 83.46,44.615 83.46,42.8 cw(c80.46,42.8) 80.46,39.8 62.928,39.8 cw(c62.928,41.8) 61.514,40.386 48.3,53.6 ; 85.3,75.8 ccw(c86.221,72.708) 83,72.9 83,67.143 ccw(c86,67.142) 83.879,65.021 87.661,61.239 cw(c85.54,59.117) 88.54,59.117 88.51,55.165
Bottom Solder:
  circle w0: c75,49.8 r3
  circle w0: c24.8,49.8 r3
  circle w0: c49.9,74.9 r3
  circle w0: c49.9,24.7 r3
  lines w1.5: 22.1,34 24.996,34 ccw(c24.996,36.183) 26.539,34.639 33.903,42.003 ccw(c31.075,44.832) 35.075,44.832 35.075,50.01 ; 34.043,77.657 cw(c32.247,75.454) 35.075,75.742 35.075,54.69 ; 37.8,54.6 ccw(c36.3,55.4) 38,55.4 38,62.7 ; 38,62.8 cw(c43.7,62.899) 43.7,68.6 49.3,68.6 ; 49.5,68.6 cw(c49.56,65.26) 52.9,65.2 ccw(c128.536,63.85) 52.9,62.5 ccw(c58.147,62.594) 55.8,57.9 56.6,57.5 ; 58.275,53.91 58.275,48.639 ccw(c59.275,48.639) 58.568,47.932 60.197,46.303 ccw(c60.854,46.89) 60.804,46.01 ; 58.711,79.989 62.39,76.31 ; 61.818,57.783 62.307,58.272 ccw(c61.742,58.638) 62.4,58.779 62.4,76.286 ; 64.2,36.9 64.2,44.6 ; 64.206,37.4 64.206,27.894 64.2,27.8 64.225,24.19 ccw(c66.447,24.397) 65.011,22.689 65.7,22 ; 64.4,53.1 64.4,54 cw(c67.545,54) 65.4,56.3 73.9,64.8 ; 64.425,49.29 64.425,53.6 ; 73.7,64.6 cw(c75.8,62.895) 75.8,65.6 77.7,65.6
Dimension:
  the board outline again, w0.001
tPlace:
  text "UHF BAND" at 39.3,41.4 h1.28
  text "OreSat0 +Z End Card Mezzanine Board" at 26.1,18.85 h1.28
  text "v2.0  2021-11-01" at 26.1,16.6 h1.28
bPlace:
  region: 31,21 31,29 39,29 39,21
  text "L1 BAND" at 48.4,41.4 h1.28
  text "OreSat0 +Z End Card Mezzanine Board" at 67.9,18.35 h1.28
  text "v2.0  2021-11-01" at 67.9,16.1 h1.28
dxf:
  circle w0.001: c49.9,74.9 r1.55
  circle w0.001: c75,49.8 r1.2
  circle w0.001: c49.9,24.7 r1.55
  circle w0.001: c24.8,49.8 r1.2
  circle w0.001: c76.93,22.77 r2.75
  circle w0.001: c22.87,22.77 r2.75
  circle w0.001: c76.93,76.83 r2.75
  circle w0.001: c22.87,76.83 r2.75
  lines w0.001: 8.4,3.307 8.4,87.683 ; 25.369,27.531 27.631,25.269 ; 25.369,72.069 27.631,74.331 ; 72.169,25.269 74.431,27.531 ; 72.169,74.331 74.431,72.069 ; 88,74.3 88,77.5 ; 91.4,3.307 91.4,87.683 ; 91.4,10.8 91.4,12.8 ; 11,13.4 ccw(c13,13.4) 13,11.4 89,11.4 ccw(c89,13.4) 91,13.4 91,80.9 ccw(c89,80.9) 89,82.9 13,82.9 ccw(c13,80.9) 11,80.9 11,13.4

## Text inside footprints (layer, text, board x,y; h text height)
U$1: tPlace "NOT FLIGHT HARDWARE" at 57.66,13.4 h1.08